# Altium PCB PCB_heater-base-2-ESP32-C3_2025-09-19.pcbdoc
Units mil, origin at the board's own origin, x right, y up, seen from the top; angles counter-clockwise.
Board outline 3875 x 3760 mil, 2 copper layers (Top Layer, Bottom Layer); 37 components, 59 nets, 195 pads, 35 vias.
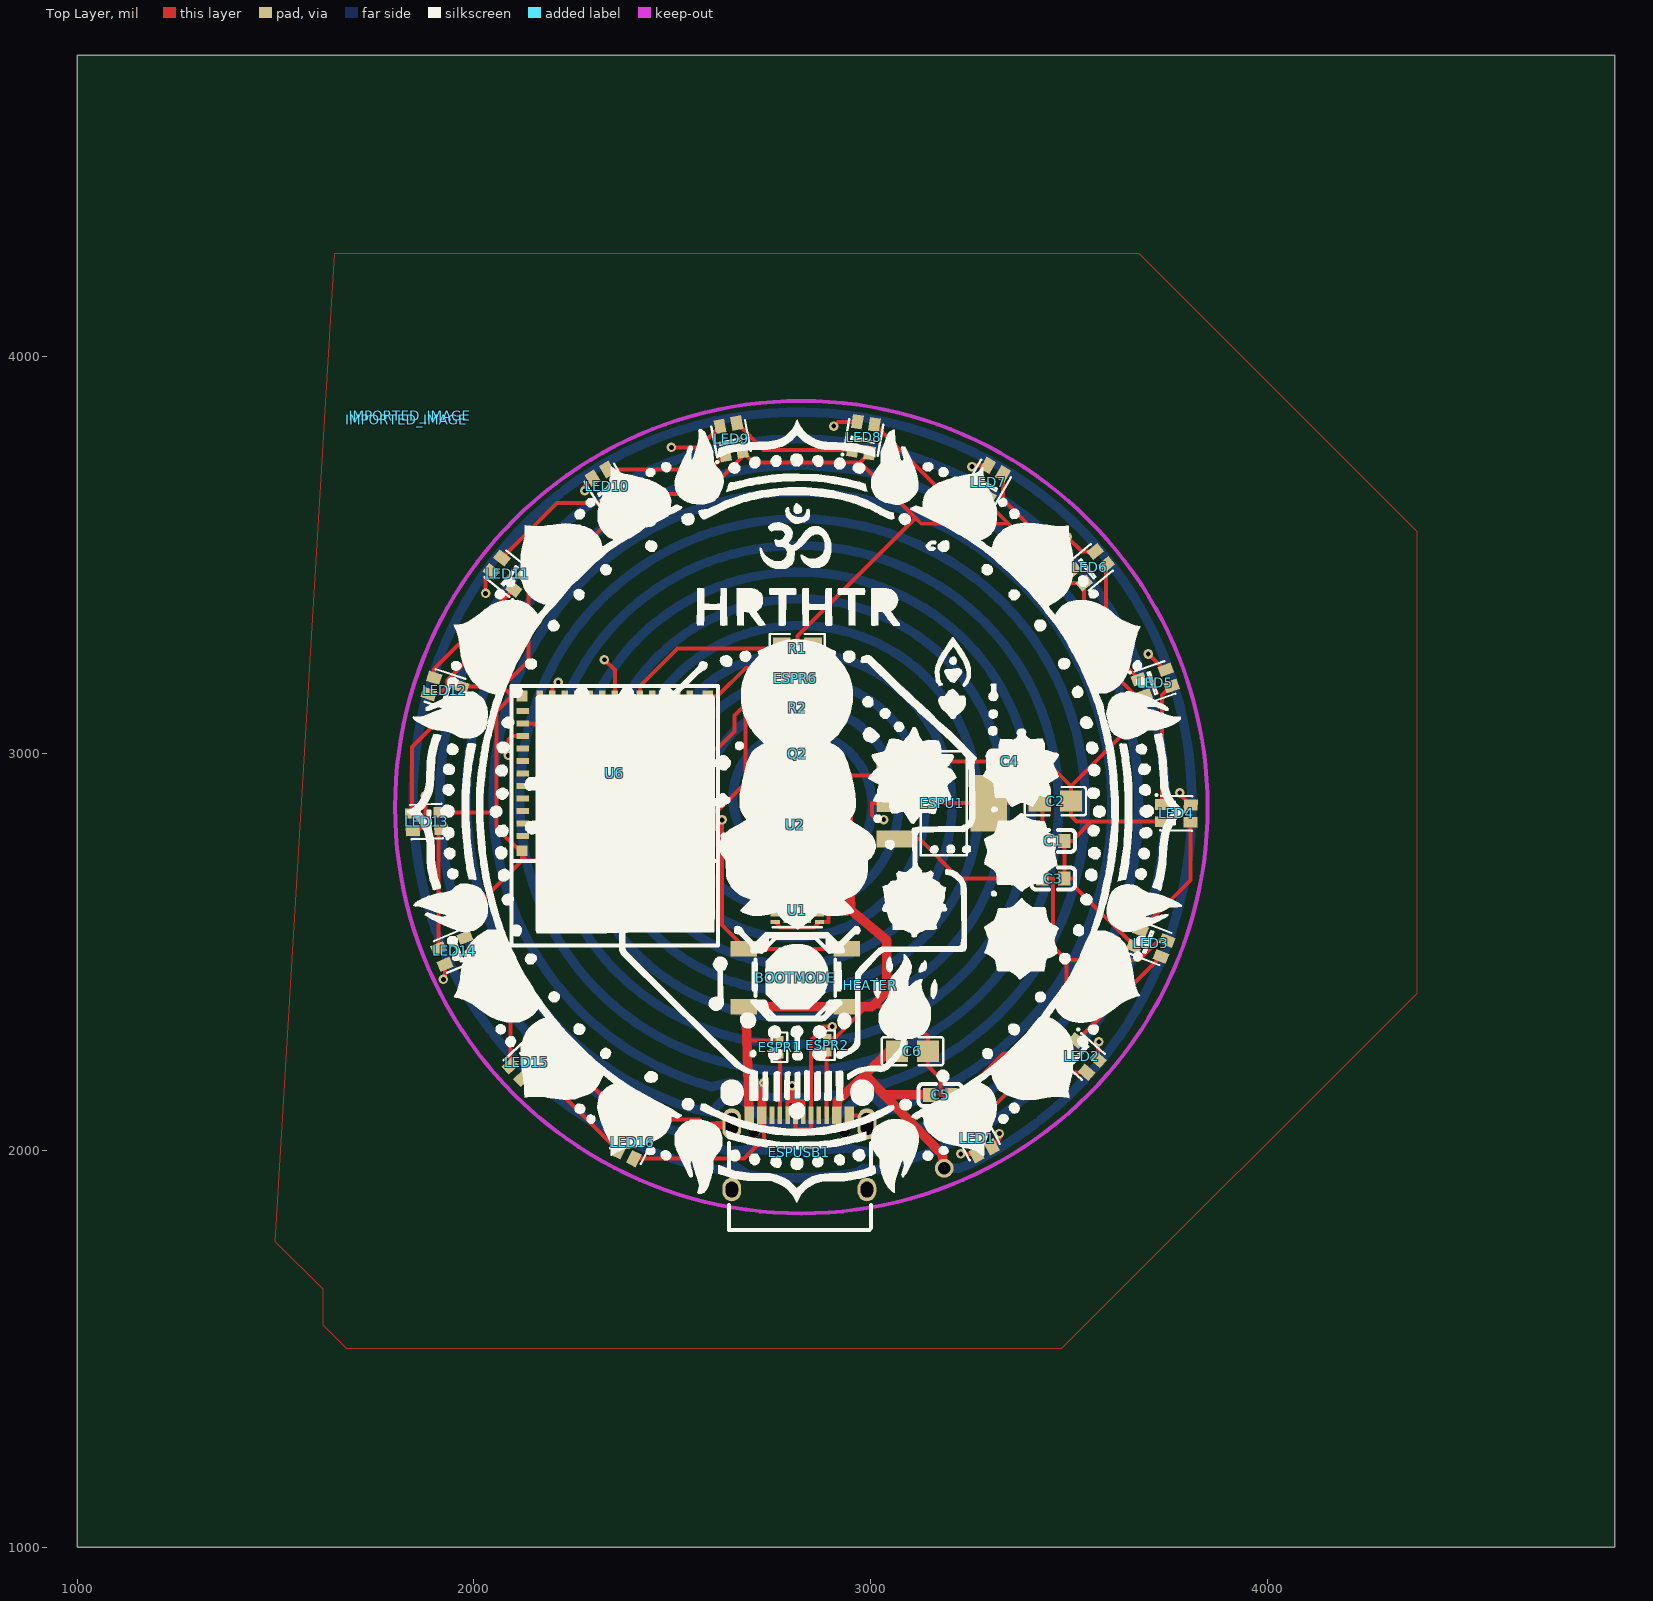
[diagram p0: Top Layer view]
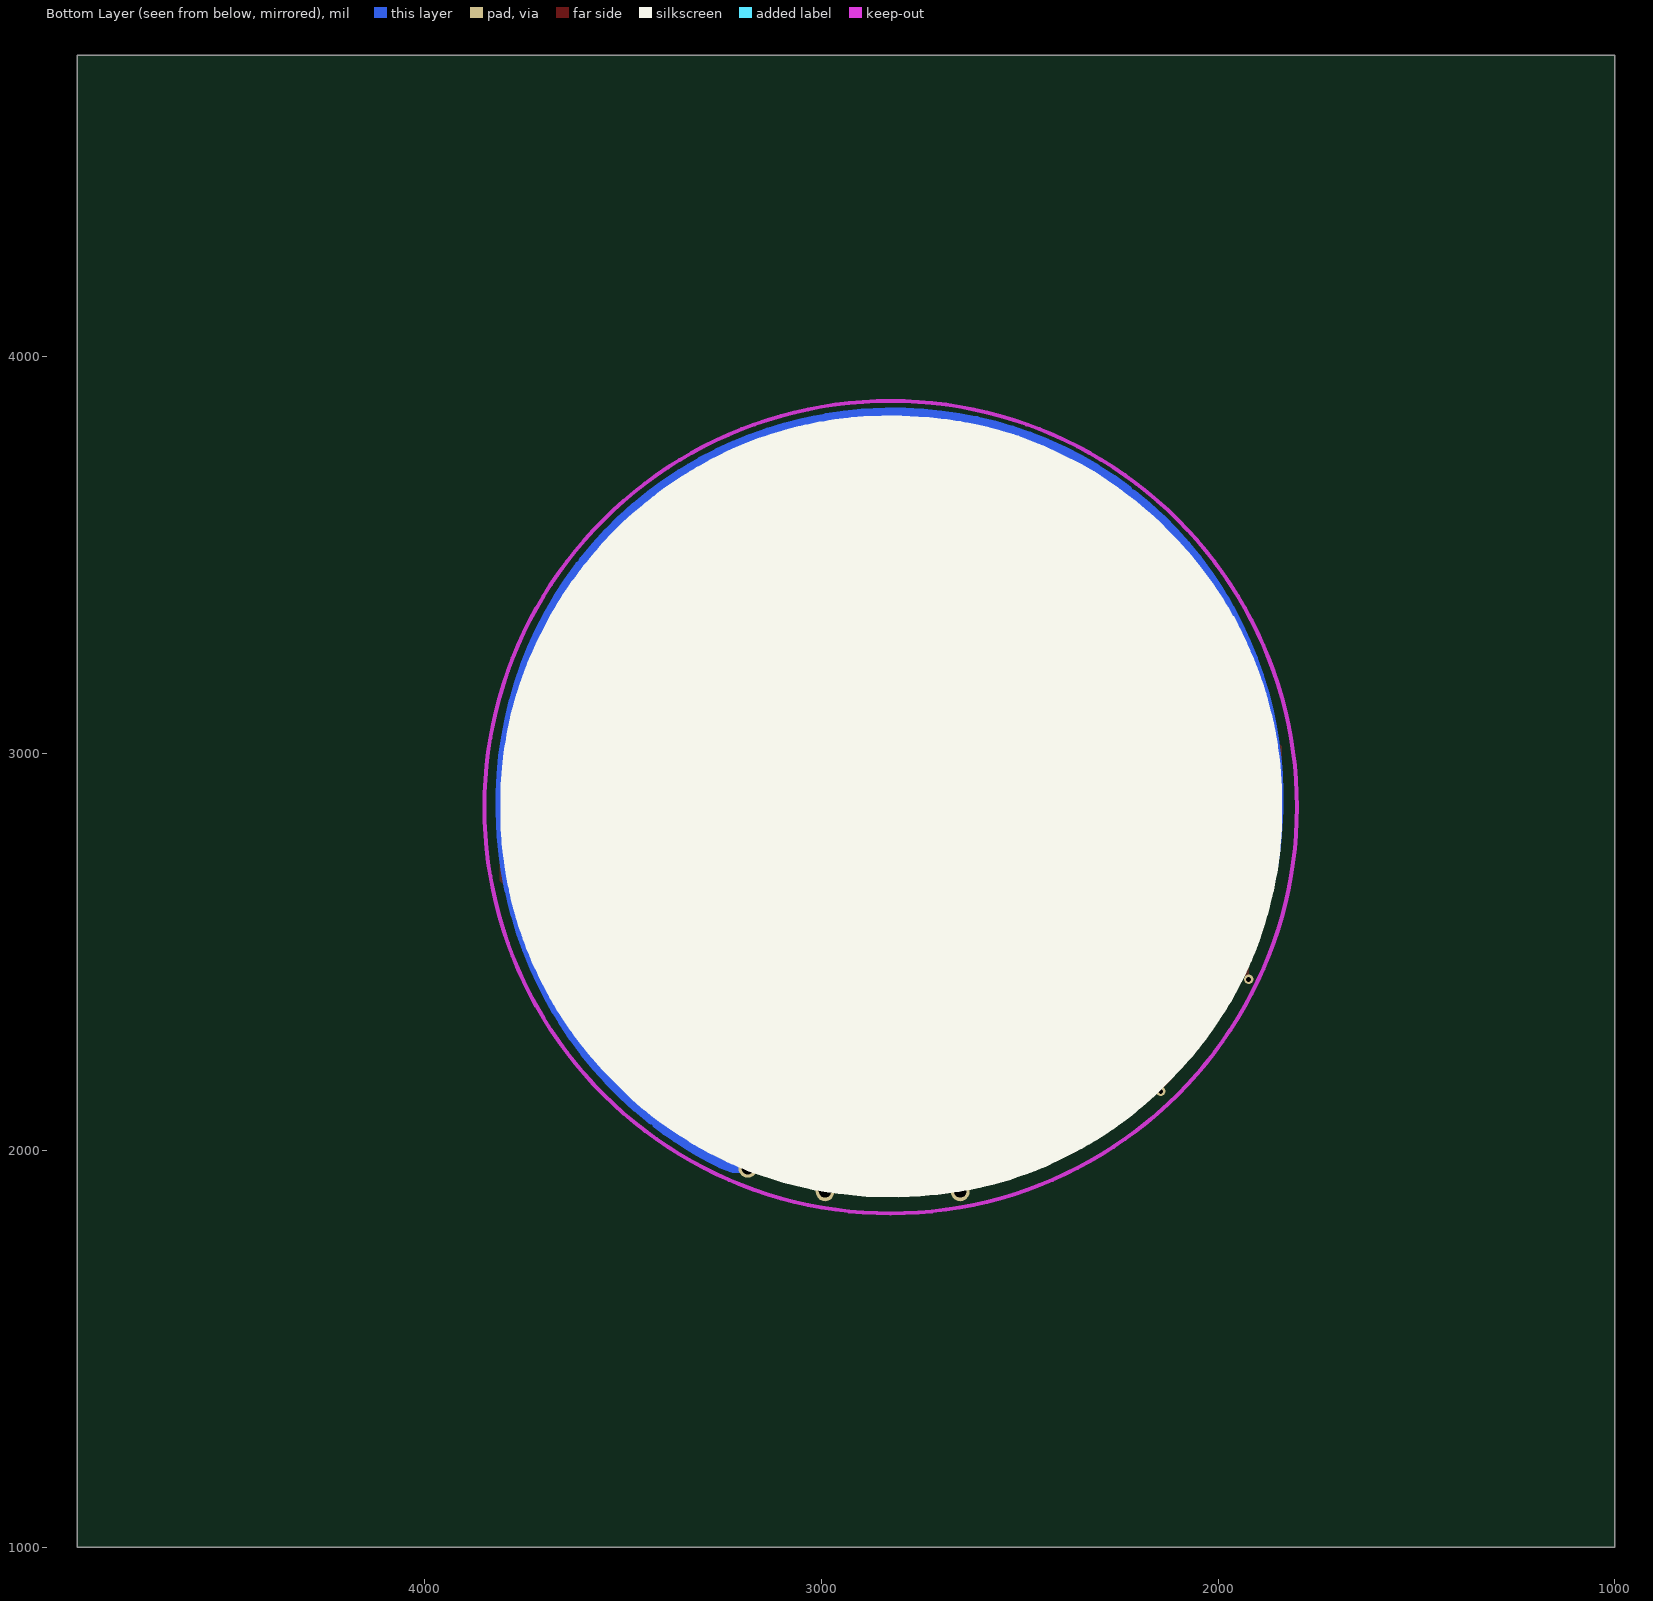
[diagram p1: Bottom Layer view, seen from below]

## Layer stack, top to bottom
Top Layer: signal copper (thickness not stored)
Dielectric: dielectric 12.6, FR-4, Dk 4.8
Bottom Layer: signal copper (thickness not stored)

## Board outline
4875,1000 1000,1000 1000,4760 4875,4760

## Components (designator, comment, footprint, x,y, rotation, side; value= is the part's Value field where it differs from the comment)
BOOTMODE "TS-1187A-B-A-B" SW-SMD_4P-L5.1-W5.1-P3.70-LS6.5-TL-2 2810,2435 r0 top
C1 "100nF" C0603 3460,2780 r0 top
C2 "10uF" C0805 3465,2880 r180 top
C3 "100nF" C0603 3460,2685 r180 top
C4 "100nF" C0603 3350,2980 r0 top
C5 "100nF" C0603 3175,2140 r180 top
C6 "10uF" C0805 3105,2250 r0 top
ESPR1 "4.7kΩ" R0402 2770,2260 r90 top
ESPR2 "4.7kΩ" R0402 2890,2265 r90 top
ESPR6 "10K" R0402 2810,3190 r0 top
ESPU1 "AMS1117-3.3" SOT-223-3_L6.5-W3.4-P2.30-LS7.0-BR 3180,2875 r180 top
ESPUSB1 "TYPE-C 16PIN 2MD(073)" USB-C-SMD_TYPE-C-6PIN-2MD-073 2820,1995 r0 top
HEATER "12.5" HEATER_SPIRAL_5CM 2805,2875 r0 top
IMPORTED_IMAGE "IMPORTED_IMAGE" IMPORTED_IMAGE 1839.25,3851.04 r0 top
IMPORTED_IMAGE "IMPORTED_IMAGE" IMPORTED_IMAGE 1830.75,3841.22 r0 top
LED1 "SK6805-EC20" LED-SMD_4P-L2.0-W2.0-TL_WS2812B-2020 3268.62,2030.74 r298 top
LED2 "SK6805-EC20" LED-SMD_4P-L2.0-W2.0-TL_WS2812B-2020 3531.03,2237.05 r318.35 top
LED3 "SK6805-EC20" LED-SMD_4P-L2.0-W2.0-TL_WS2812B-2020 3705.32,2521.74 r338.7 top
LED4 "SK6805-EC20" LED-SMD_4P-L2.0-W2.0-TL_WS2812B-2020 3769.72,2849.34 r359.05 top
LED5 "SK6805-EC20" LED-SMD_4P-L2.0-W2.0-TL_WS2812B-2020 3716.22,3178.84 r19.4 top
LED6 "SK6805-EC20" LED-SMD_4P-L2.0-W2.0-TL_WS2812B-2020 3551.43,3469.14 r39.75 top
LED7 "SK6805-EC20" LED-SMD_4P-L2.0-W2.0-TL_WS2812B-2020 3296.03,3684.14 r60.1 top
LED8 "SK6805-EC20" LED-SMD_4P-L2.0-W2.0-TL_WS2812B-2020 2981.72,3796.74 r80.45 top
LED9 "SK6805-EC20" LED-SMD_4P-L2.0-W2.0-TL_WS2812B-2020 2647.93,3793.14 r100.8 top
LED10 "SK6805-EC20" LED-SMD_4P-L2.0-W2.0-TL_WS2812B-2020 2336.22,3673.64 r121.15 top
LED11 "SK6805-EC20" LED-SMD_4P-L2.0-W2.0-TL_WS2812B-2020 2085.53,3453.24 r141.5 top
LED12 "SK6805-EC20" LED-SMD_4P-L2.0-W2.0-TL_WS2812B-2020 1927.12,3159.34 r161.85 top
LED13 "SK6805-EC20" LED-SMD_4P-L2.0-W2.0-TL_WS2812B-2020 1880.83,2828.74 r182.2 top
LED14 "SK6805-EC20" LED-SMD_4P-L2.0-W2.0-TL_WS2812B-2020 1952.33,2502.64 r202.55 top
LED15 "SK6805-EC20" LED-SMD_4P-L2.0-W2.0-TL_WS2812B-2020 2132.82,2221.84 r222.9 top
LED16 "SK6805-EC20" LED-SMD_4P-L2.0-W2.0-TL_WS2812B-2020 2399.72,2021.24 r243.25 top
Q2 "AO3400A" SOT-23-3_L2.9-W1.3-P1.90-LS2.4-BR 2815,3000 r270 top
R1 "240Ω" R0805 2815,3265 r180 top
R2 "10kΩ" R0805 2815,3115 r0 top
U1 "MCP9808T-E/MC" DFN-8_L3.0-W2.0-P0.50-TL-EP-1 2815,2605 r0 top
U2 "MCP9808T-E/MC" DFN-8_L3.0-W2.0-P0.50-TL-EP-1 2810,2820 r0 top
U6 "ESP32-C3-MINI-1-H4" WIFIM-SMD_ESP32-C3-MINI-1 2355,2950 r180 top

## Footprints (in the part's own frame and the unit in brackets; to place one, negate y for a bottom-side part, rotate by r counter-clockwise, add the part's x,y. Pads: shape width x height; smd on the part's side, far side on the other; paste and mask are expansions set on the pad)
C0603 [mm]
  rect 0.8x0.9 smd paste+0 mask+0.051: 1(-0.7,0) 2(0.7,0)
  silkscreen extent -1.39,-0.71 1.39,0.71
C0805 [mm]
  rect 1.41x1.35 smd paste-100 mask+0.051: 1(-1,0) 2(1,0)
  silkscreen extent -1.96,-0.9 1.96,0.9
DFN-8_L3.0-W2.0-P0.50-TL-EP-1 [mm]
  rect 0.585x0.28 smd paste+0 mask+0.051: 1(-1.417,0.75) 2(-1.417,0.25) 3(-1.417,-0.25) 4(-1.417,-0.75) 5(1.417,-0.75) 6(1.417,-0.25) 7(1.417,0.25) 8(1.417,0.75)
  rect 1.75x1.63 smd paste+0 mask+0.051: 9(0,0)
  silkscreen extent -2.08,-1.08 1.58,1.08
HEATER_SPIRAL_5CM [mm]
  round 1.2 hole 0.8 paste+0 mask+0.051: 1(0.183,0.043) 2(9.652,-23.368)
  Bottom Layer drawing of 1592 lines, arcs and shapes, not listed
IMPORTED_IMAGE [mil]
LED-SMD_4P-L2.0-W2.0-TL_WS2812B-2020 [mm]
  rect 0.9x0.7 smd paste+0 mask+0.051: 1(-0.915,0.55) 2(-0.915,-0.55) 3(0.915,-0.55) 4(0.915,0.55)
  silkscreen extent -1.3,-1.1 1,1.15
R0402 [mm]
  rect 0.566x0.54 smd paste-100 mask+0.051: 1(-0.433,0) 2(0.433,0)
  silkscreen extent -0.94,-0.5 0.94,0.5
R0805 [mil]
  rect 44.59x54.21 smd paste-3937.01 mask+2: 1(-39.37,0) 2(39.37,0)
  silkscreen extent -69,-36 69,36
SOT-23-3_L2.9-W1.3-P1.90-LS2.4-BR [mm]
  rect 1.25x0.7 smd paste+0 mask+0.051: 1(1,-0.95) 2(1,0.95) 3(-1,0)
  silkscreen extent -0.73,-1.53 0.73,1.53
SOT-223-3_L6.5-W3.4-P2.30-LS7.0-BR [mm]
  rect 2.5x1.1 smd paste+0 mask+0.051: 1(2.97,-2.3) 2(2.97,0) 3(2.97,2.3)
  rect 2.34x3.6 smd paste+0 mask+0.051: 4(-2.97,0)
  silkscreen extent -1.57,-3.33 1.37,3.33
SW-SMD_4P-L5.1-W5.1-P3.70-LS6.5-TL-2 [mm]
  rect 1.7x1 smd paste+0 mask+0.051: 1(-3.3,1.85) 2(3.3,1.85) 3(-3.3,-1.85) 4(3.3,-1.85)
  silkscreen extent -2.55,-2.55 2.55,2.55
USB-C-SMD_TYPE-C-6PIN-2MD-073 [mm]
  rect 0.6x1.1 smd paste-100 mask+0.05: 1(-3.2,2.375) 2(-2.4,2.375) 11(2.4,2.375) 12(3.2,2.375)
  rect 0.3x1.1 smd paste-100 mask+0.05: 3(-1.75,2.375) 4(-1.25,2.375) 5(-0.75,2.375) 6(-0.25,2.375) 7(0.25,2.375) 8(0.75,2.375) 9(1.25,2.375) 10(1.75,2.375)
  oval 1.2x1.5 hole 0.8 slot 1 at 90 deg paste+0 mask+0.05: 13(-4.325,-2.375) 14(4.325,-2.375)
  oval 1.2x2 hole 0.8 slot 1.4 at 90 deg paste+0 mask+0.05: 13(-4.325,1.825) 14(4.325,1.825)
  round 0.7 hole 0.7 unplated paste+0: ""(-2.89,1.305) ""(2.89,1.305)
  silkscreen extent -4.5,-4.97 4.57,0.6
WIFIM-SMD_ESP32-C3-MINI-1 [mm]
  rect 0.8x0.4 smd paste+0 mask+0.05: 1(-5.9,4) 2(-5.9,3.2) 3(-5.9,2.4) 4(-5.9,1.6) 5(-5.9,0.8) 6(-5.9,0) 7(-5.9,-0.8) 8(-5.9,-1.6) 9(-5.9,-2.4) 10(-5.9,-3.2) 11(-5.9,-4) 25(5.9,-4) 26(5.9,-3.2) 27(5.9,-2.4) 28(5.9,-1.6) 29(5.9,-0.8) 30(5.9,0) 31(5.9,0.8) 32(5.9,1.6) 33(5.9,2.4) 34(5.9,3.2) 35(5.9,4)
  rect 0.4x0.8 smd paste+0 mask+0.05: 12(-4.8,-4.9) 13(-4,-4.9) 14(-3.2,-4.9) 15(-2.4,-4.9) 16(-1.6,-4.9) 17(-0.8,-4.9) 18(0,-4.9) 19(0.8,-4.9) 20(1.6,-4.9) 21(2.4,-4.9) 22(3.2,-4.9) 23(4,-4.9) 24(4.8,-4.9) 36(4.8,4.9) 37(4,4.9) 38(3.2,4.9) 39(2.4,4.9) 40(1.6,4.9) 41(0.8,4.9) 42(0,4.9) 43(-0.8,4.9) 44(-1.6,4.9) 45(-2.4,4.9) 46(-3.2,4.9) 47(-4,4.9) 48(-4.8,4.9)
  rect 1.45x1.45 smd paste+0 mask+0.05: 49(-1.975,0) 49(-1.975,-1.975) 49(0,1.975) 49(0,0) 49(0,-1.975) 49(1.975,1.975) 49(1.975,0) 49(1.975,-1.975)
  rect 0.7x0.7 smd paste+0 mask+0.05: 50(5.95,4.95) 51(5.95,-4.95) 52(-5.95,-4.95) 53(-5.95,4.95)
  Top Layer region: -2.7,2.1 -2.1,2.7 -1.25,2.7 -1.25,1.25 -2.7,1.25
  silkscreen extent -7.1,-5.6 6.6,11

## Via types
v1: diameter 24.02, hole 12.01, Top Layer to Bottom Layer, tented both sides, 35 vias

## Nets (pads, with @x,y where several pads share a name; then routed paths per layer and width w, separated by ;. In a path a pad name is that pad's centre, name@x,y a point inside that pad or via, vN(x,y) a via of type N, cw(c..) or ccw(c..) an arc to the next point about the centre after c; other vN are vias at no path point)
+3V3: C1.1 C2.2 C4.2 ESPR6.2 ESPU1.2 ESPU1.4 U1.7 U1.8 U2.8 U6.3 | length 2169.1
  Top Layer w10: U6.3 2614.02,2855.51 2673.02,2914.51 v1@2684.67,2914.51 ; v1(2686.12,2913.06) v1@2684.67,2914.51 ; ESPR6.2 2849.17,3190 2849.17,3169.28 2846.26,3166.37 2756.74,3166.37 2684.67,3094.3 v1@2684.67,2914.51 ; v1(2846.85,2707.69) 2870.81,2683.73 U1.8 2893.32,2634.53 ; U2.8 2896.55,2849.53 2916.22,2829.86 2916.22,2657.43 2893.32,2634.53 ; U1.7 2893.32,2614.84 2893.32,2634.53 ; v1(3032.7,2833.59) 3014.55,2833.59 3002.87,2845.27 3002.87,2875 ESPU1.2 ESPU1.4 3359.19,2875 3364.19,2880 ; C4.2 3364.19,2980 3364.19,2880 ; C2.2 C2.2@3406.26,2880 ; C1.1 3432.44,2853.82 C2.2@3406.26,2880 ; 3364.19,2880 3386.88,2880 C2.2@3406.26,2880
  Mid-Layer 1 w10: v1(2686.12,2913.06) 2782.73,2816.45 2846.85,2816.45 ; v1(2846.85,2707.69) 2846.85,2816.45 ; v1(3032.7,2833.59) 2863.99,2833.59 2846.85,2816.45
+5V: C3.2 ESPU1.3 ESPUSB1.2 ESPUSB1.11 LED1.4 LED2.4 LED3.4 LED4.4 LED5.4 LED6.4 LED7.4 LED8.4 LED9.4 LED10.4 LED11.4 LED12.4 LED13.4 LED14.4 LED15.4 LED16.4 | length 14832.3
  Top Layer w10: LED13.4 1859.47,2805.72 1877.48,2823.73 v1(1877.48,2893.83) ; LED12.4 1912.34,3149.99 1931.83,3169.48 1931.83,3183.93 2017.26,3269.36 v1(2108.62,3269.36) ; v1(1923.31,2430.82) 1927.36,2434.87 LED14.4 ; v1(2029.54,3403.52) 2029.54,3444.41 LED11.4@2043.85,3458.72 ; LED15.4 2144.35,2158.29 v1@2144.35,2148.82 ; v1(2279.07,3662.24) 2279.07,3673.28 LED10.4 ; LED16.4 2680.08,1979.33 2731.34,2030.59 2731.34,2082.68 ESPUSB1.2 2726,2124 v1(2730,2170) ; v1(2497.52,3771.27) 2566.7,3771.27 LED9.4 ; v1(2906.7,3825.1) 2917.46,3835.86 LED8.4 ; ESPU1.3@3063.07,2784.45 3123.28,2784.45 3222.73,2685 C3.2 3459.18,2685 3459.18,2514.3 3493.36,2480.12 ; v1(3254.97,3723.08) 3258.06,3726.17 LED7.4 ; LED1.4 3323.92,2028.36 v1(3323.92,2042.58) ; v1(3493.36,2395.96) 3493.36,2480.12 ; v1(3494.83,3546.06) 3532.06,3508.83 LED6.4 ; LED2.4 3572.34,2271.5 v1(3574.87,2274.03) ; v1(3699.09,3250.79) 3738.64,3211.24 LED5.4 ; LED3.4 3724.5,2528.83 3675.79,2480.12 3493.36,2480.12 ; v1(3778.22,2901.22) 3778.22,2898.28 LED4.4
  Top Layer w23.62: ESPUSB1.2 2726,2124 v1(2730,2170)
  Mid-Layer 2 w10: v1(1877.48,2893.83) 1842.19,2893.83 1841.21,2894.81 ; v1(1923.31,2430.82) 1932.09,2439.6 1932.09,2450.95 ; v1(2108.62,3269.36) 2108.62,3324.44 v1(2029.54,3403.52) 2023.71,3403.52 2010.17,3417.06 ; v1@2144.35,2148.82 v1@2149.85,2148.82 ; v1(2279.07,3662.24) 2267.87,3673.44 2267.87,3676.39 ; 2488,1940.11 2488.05,1940.23 ; 2488.37,1940.11 2488.31,1940.13 2488.05,1940.23 ; v1(2497.52,3771.27) 2497.52,3782.8 2513.32,3798.6 ; v1(2730,2170) 2695,2170 2575,2140 2488.05,1940.23 ; v1(2906.7,3825.1) 2906.7,3845.45 2907.07,3845.82 ; v1(3254.97,3723.08) 3271.76,3739.87 3271.76,3742.01 ; 3287.08,1995.96 3294.89,2000.16 3302.67,2004.43 3310.41,2008.77 3318.11,2013.18 3325.77,2017.66 3333.39,2022.21 ; v1(3323.92,2042.58) 3333.39,2033.11 3333.39,2022.21 ; v1(3493.36,2395.96) 3574.87,2314.45 v1(3574.87,2274.03) 3592.55,2256.35 3592.55,2248.86 ; v1(3494.83,3546.06) 3502.82,3554.05 3502.82,3578.66 ; v1(3699.09,3250.79) 3699.09,3262 3717.35,3280.26 ; v1(3778.22,2901.22) 3798.79,2901.22 3801.31,2898.7 3808.67,2898.7 ; 1841.21,2894.81 1841.24,2895.98 1841.56,2904.85 1841.96,2913.71 1842.44,2922.58 1843,2931.43 1843.63,2940.28 1844.35,2949.13 1845.15,2957.96 1846.03,2966.79 1846.99,2975.61 1848.02,2984.43 1849.14,2993.23 1850.34,3002.02 1851.61,3010.8 1852.96,3019.57 1854.4,3028.33 1855.91,3037.07 1857.5,3045.8 1859.17,3054.52 1860.92,3063.22 1862.74,3071.9 1864.65,3080.57 1866.63,3089.22 1868.69,3097.85 1870.83,3106.46 1873.04,3115.05 1875.34,3123.63 1877.71,3132.18 1880.16,3140.71 1882.68,3149.21 1885.28,3157.7 1887.96,3166.16 1890.71,3174.59 1893.54,3183 1896.44,3191.39 1899.42,3199.75 1902.48,3208.08 1905.61,3216.38 1908.82,3224.65 1912.1,3232.9 1915.45,3241.11 1918.88,3249.3 1922.38,3257.45 1925.95,3265.57 1929.6,3273.66 1933.32,3281.72 1937.11,3289.74 1940.98,3297.73 1944.92,3305.68 1948.93,3313.6 1953.01,3321.48 1957.16,3329.32 1961.38,3337.12 1965.67,3344.89 1970.03,3352.62 1974.46,3360.31 1978.96,3367.96 1983.53,3375.56 1988.17,3383.13 1992.87,3390.65 1997.65,3398.13 2002.49,3405.57 2007.39,3412.96 2010.17,3417.06 ; 1841.21,2894.81 1841,2887.11 1840.84,2878.24 1840.76,2869.37 1840.76,2860.49 1840.84,2851.62 1841,2842.75 1841.24,2833.88 1841.56,2825.01 1841.96,2816.15 1842.44,2807.29 1843.01,2798.43 1843.65,2789.58 1844.37,2780.73 1845.16,2771.9 1846.04,2763.07 1847,2754.25 1848.04,2745.43 1849.16,2736.63 1850.36,2727.84 1851.63,2719.06 1852.99,2710.29 1854.42,2701.53 1855.93,2692.79 1857.53,2684.06 1859.2,2675.34 1860.95,2666.64 1862.77,2657.96 1864.68,2649.29 1866.66,2640.65 1868.72,2632.01 1870.86,2623.4 1873.08,2614.81 1875.37,2606.24 1877.75,2597.69 1880.19,2589.16 1882.72,2580.65 1885.32,2572.17 1888,2563.71 1890.75,2555.27 1893.58,2546.86 1896.49,2538.48 1899.47,2530.12 1902.53,2521.79 1905.66,2513.49 1908.87,2505.22 1912.15,2496.97 1915.5,2488.76 1918.93,2480.57 1922.43,2472.42 1926.01,2464.3 1929.66,2456.21 1932.09,2450.95 ; 1932.09,2450.95 1933.38,2448.15 1937.17,2440.13 1941.04,2432.15 1944.98,2424.19 1948.99,2416.28 1953.07,2408.4 1957.22,2400.56 1961.44,2392.75 1965.74,2384.99 1970.1,2377.26 1974.53,2369.57 1979.03,2361.92 1983.6,2354.32 1988.24,2346.75 1992.95,2339.23 1997.72,2331.75 2002.56,2324.31 2007.47,2316.92 2012.44,2309.57 2017.48,2302.27 2022.59,2295.01 2027.76,2287.8 2033,2280.64 2038.3,2273.52 2043.66,2266.45 2049.09,2259.43 2054.58,2252.46 2060.13,2245.54 2065.75,2238.67 2071.43,2231.85 2077.17,2225.08 2082.97,2218.37 2088.83,2211.71 2094.75,2205.09 2100.72,2198.54 2106.76,2192.04 2112.86,2185.59 2119.01,2179.2 2125.22,2172.86 2131.49,2166.58 2137.82,2160.35 2144.2,2154.19 v1@2149.85,2148.82 ; 2010.17,3417.06 2012.37,3420.31 2017.4,3427.61 2022.51,3434.87 2027.68,3442.08 2032.91,3449.25 2038.21,3456.37 2043.58,3463.44 2049,3470.46 2054.49,3477.43 2060.05,3484.35 2065.66,3491.22 2071.34,3498.04 2077.08,3504.81 2082.87,3511.53 2088.73,3518.19 2094.65,3524.8 2100.63,3531.36 2106.67,3537.86 2112.76,3544.31 2118.92,3550.7 2125.13,3557.04 2131.39,3563.32 2137.72,3569.55 2144.1,3575.72 2150.53,3581.83 2157.02,3587.88 2163.57,3593.87 2170.16,3599.8 2176.82,3605.68 2183.52,3611.49 2190.28,3617.24 2197.08,3622.94 2203.94,3628.57 2210.85,3634.13 2217.81,3639.64 2224.82,3645.08 2231.88,3650.46 2238.98,3655.78 2246.13,3661.03 2253.33,3666.21 2260.58,3671.33 2267.87,3676.39 ; v1@2149.85,2148.82 2150.63,2148.08 2157.12,2142.03 2163.67,2136.04 2170.27,2130.1 2176.92,2124.23 2183.63,2118.42 2190.38,2112.67 2197.19,2106.98 2204.05,2101.35 2210.96,2095.78 2217.92,2090.27 2224.93,2084.83 2231.99,2079.45 2239.09,2074.14 2246.25,2068.89 2253.45,2063.7 2260.69,2058.58 2267.99,2053.53 2275.33,2048.54 2282.71,2043.62 2290.14,2038.76 2297.61,2033.97 2305.12,2029.25 2312.68,2024.6 2320.27,2020.02 2327.91,2015.5 2335.59,2011.05 2343.31,2006.68 2351.07,2002.37 2358.86,1998.13 2366.7,1993.96 2374.57,1989.87 2382.48,1985.84 2390.42,1981.89 2398.4,1978.01 2406.41,1974.2 2414.46,1970.46 2422.54,1966.79 2430.66,1963.2 2438.8,1959.68 2446.98,1956.24 2455.19,1952.87 2463.43,1949.57 2471.69,1946.35 2479.99,1943.2 2488.05,1940.23 ; 2267.87,3676.39 2275.21,3681.38 2282.59,3686.3 2290.02,3691.16 2297.49,3695.95 2305,3700.67 2312.56,3705.33 2320.15,3709.91 2327.79,3714.43 2335.47,3718.88 2343.19,3723.26 2350.94,3727.56 2358.74,3731.8 2366.57,3735.97 2374.44,3740.07 2382.35,3744.1 2390.29,3748.05 2398.27,3751.93 2406.29,3755.74 2414.33,3759.48 2422.41,3763.15 2430.53,3766.74 2438.67,3770.26 2446.85,3773.71 2455.06,3777.08 2463.3,3780.38 2471.56,3783.6 2479.86,3786.75 2488.18,3789.83 2496.54,3792.82 2504.91,3795.75 2513.32,3798.6 ; 2513.32,3798.6 2521.75,3801.37 2530.2,3804.06 2538.68,3806.68 2547.18,3809.23 2555.7,3811.69 2564.25,3814.08 2572.82,3816.39 2581.4,3818.63 2590.01,3820.79 2598.64,3822.87 2607.28,3824.87 2615.94,3826.79 2624.62,3828.64 2633.32,3830.4 2642.03,3832.09 2650.76,3833.7 2659.5,3835.24 2668.25,3836.69 2677.02,3838.06 2685.8,3839.36 2694.59,3840.57 2703.39,3841.71 2712.2,3842.76 2721.02,3843.74 2729.84,3844.64 2738.68,3845.46 2747.52,3846.2 2756.37,3846.85 2765.23,3847.43 2774.09,3847.93 2782.95,3848.35 2791.82,3848.69 2800.69,3848.95 2809.56,3849.13 2818.43,3849.23 2827.3,3849.25 2836.18,3849.19 2845.05,3849.05 2853.92,3848.82 2862.79,3848.52 2871.65,3848.14 2880.52,3847.68 2889.37,3847.14 2898.22,3846.52 2907.07,3845.82 ; 2907.07,3845.82 2915.91,3845.04 2924.74,3844.18 2933.57,3843.24 2942.38,3842.23 2951.19,3841.13 2959.98,3839.95 2968.76,3838.69 2977.54,3837.36 2986.3,3835.94 2995.04,3834.45 3003.78,3832.88 3012.5,3831.23 3021.2,3829.5 3029.89,3827.69 3038.56,3825.8 3047.21,3823.84 3055.85,3821.8 3064.46,3819.68 3073.06,3817.48 3081.64,3815.2 3090.19,3812.85 3098.73,3810.42 3107.24,3807.92 3115.73,3805.33 3124.19,3802.67 3132.63,3799.94 3141.05,3797.13 3149.44,3794.24 3157.81,3791.28 3166.14,3788.24 3174.45,3785.13 3182.73,3781.94 3190.99,3778.68 3199.21,3775.34 3207.4,3771.93 3215.56,3768.44 3223.69,3764.89 3231.79,3761.26 3239.85,3757.55 3247.88,3753.78 3255.88,3749.93 3263.84,3746.01 3271.76,3742.01 ; 3271.76,3742.01 3279.65,3737.95 3287.5,3733.82 3295.31,3729.61 3303.09,3725.34 3310.83,3720.99 3318.52,3716.58 3326.18,3712.09 3333.8,3707.54 3341.37,3702.92 3348.91,3698.23 3356.4,3693.47 3363.84,3688.65 3371.25,3683.76 3378.61,3678.8 3385.92,3673.77 3393.19,3668.68 3400.41,3663.53 3407.59,3658.31 3414.72,3653.03 3421.8,3647.68 3428.83,3642.26 3435.81,3636.79 3442.74,3631.25 3449.63,3625.65 3456.46,3619.99 3463.24,3614.27 3469.97,3608.48 3476.65,3602.64 3483.27,3596.73 3489.84,3590.77 3496.36,3584.74 3502.82,3578.66 ; 3333.39,2022.21 3340.97,2026.83 3348.5,2031.52 3355.99,2036.27 3363.44,2041.09 3370.85,2045.98 3378.21,2050.93 3385.53,2055.95 3392.8,2061.04 3400.02,2066.19 3407.2,2071.41 3414.33,2076.69 3421.42,2082.03 3428.45,2087.44 3435.44,2092.91 3442.37,2098.45 3449.26,2104.05 3456.09,2109.7 3462.88,2115.42 3469.61,2121.21 3476.29,2127.05 3482.91,2132.95 3489.49,2138.91 3496.01,2144.93 3502.47,2151.01 3508.88,2157.15 3515.23,2163.34 3521.53,2169.59 3527.77,2175.9 3533.96,2182.26 3540.08,2188.68 3546.15,2195.16 3552.16,2201.68 3558.11,2208.27 3564,2214.9 3569.83,2221.59 3575.6,2228.33 3581.31,2235.13 3586.96,2241.97 3592.55,2248.86 ; 3502.82,3578.66 3509.22,3572.52 3515.57,3566.32 3521.87,3560.07 3528.11,3553.76 3534.29,3547.39 3540.41,3540.97 3546.48,3534.49 3552.48,3527.96 3558.43,3521.38 3564.32,3514.74 3570.15,3508.05 3575.91,3501.3 3581.62,3494.51 3587.26,3487.66 3592.85,3480.76 3598.37,3473.81 3603.82,3466.82 3609.22,3459.77 3614.55,3452.68 3619.81,3445.54 3625.01,3438.35 3630.15,3431.11 3635.22,3423.83 3640.23,3416.5 3645.17,3409.13 3650.04,3401.71 3654.84,3394.25 3659.58,3386.75 3664.25,3379.21 3668.85,3371.62 3673.39,3363.99 3677.85,3356.32 3682.24,3348.61 3686.57,3340.86 3690.82,3333.08 3695.01,3325.25 3699.12,3317.39 3703.17,3309.49 3707.14,3301.56 3711.04,3293.59 3714.87,3285.58 3717.35,3280.26 ; 3592.55,2248.86 3598.07,2255.81 3603.53,2262.8 3608.93,2269.85 3614.26,2276.94 3619.53,2284.08 3624.74,2291.26 3629.88,2298.5 3634.95,2305.78 3639.96,2313.1 3644.9,2320.47 3649.78,2327.89 3654.59,2335.34 3659.33,2342.84 3664,2350.39 3668.61,2357.97 3673.14,2365.6 3677.61,2373.26 3682.01,2380.97 3686.34,2388.72 3690.6,2396.5 3694.79,2404.32 3698.9,2412.18 3702.95,2420.08 3706.93,2428.01 3710.83,2435.98 3714.66,2443.99 3718.42,2452.02 3722.11,2460.1 3725.72,2468.2 3729.26,2476.34 3732.73,2484.5 3736.12,2492.7 3739.44,2500.93 3742.69,2509.19 3745.86,2517.48 3748.95,2525.79 3751.97,2534.14 3754.92,2542.51 3757.79,2550.91 3760.58,2559.33 3763.3,2567.77 3765.94,2576.25 3768.51,2584.74 3771,2593.26 3773.41,2601.8 3775.74,2610.36 3778,2618.94 3780.18,2627.54 3782.28,2636.16 3784.3,2644.8 3786.25,2653.46 3788.12,2662.13 3789.91,2670.83 3791.62,2679.53 3793.25,2688.25 3794.81,2696.99 3796.28,2705.74 3797.68,2714.5 3798.99,2723.28 3800.23,2732.07 3801.39,2740.86 3802.47,2749.67 3803.47,2758.49 3804.39,2767.31 3805.23,2776.15 3805.99,2784.99 3806.68,2793.83 3807.28,2802.69 3807.8,2811.55 3808.24,2820.41 3808.6,2829.27 3808.88,2838.14 3809.09,2847.01 3809.21,2855.89 3809.25,2864.76 3809.21,2873.63 3809.1,2882.51 3808.9,2891.38 3808.67,2898.7 ; 3717.35,3280.26 3718.62,3277.54 3722.3,3269.47 3725.91,3261.36 3729.45,3253.22 3732.91,3245.05 3736.3,3236.85 3739.62,3228.62 3742.86,3220.36 3746.03,3212.07 3749.12,3203.76 3752.13,3195.41 3755.08,3187.04 3757.94,3178.64 3760.73,3170.22 3763.44,3161.77 3766.08,3153.3 3768.64,3144.8 3771.13,3136.28 3773.53,3127.74 3775.86,3119.18 3778.12,3110.6 3780.29,3101.99 3782.39,3093.37 3784.41,3084.73 3786.35,3076.07 3788.22,3067.4 3790,3058.71 3791.71,3050 3793.34,3041.27 3794.89,3032.54 3796.36,3023.79 3797.75,3015.02 3799.06,3006.25 3800.3,2997.46 3801.45,2988.66 3802.53,2979.85 3803.52,2971.04 3804.44,2962.21 3805.28,2953.38 3806.03,2944.54 3806.71,2935.69 3807.31,2926.83 3807.82,2917.98 3808.26,2909.11 3808.62,2900.25 3808.67,2898.7
  Mid-Layer 2 w23.62: 2488,1940.11 2575,2140 2695,2170 v1(2730,2170) ; 2488.37,1940.11 cw(c2825,2865) 3287.08,1995.96
  other v1: 2144.35,2148.82
BOOTMODE: BOOTMODE.1 BOOTMODE.2 U6.23 | length 1213
  Top Layer w10: U6.23 2197.52,3169.65 2202.68,3169.65 v1(2212.5,3179.47) ; v1(2625.04,2832.74) 2625.04,2568.31 BOOTMODE.1@2685.51,2507.84 ; BOOTMODE.1 BOOTMODE.1@2685.51,2507.84 ; BOOTMODE.2 2724.53,2507.84 BOOTMODE.1@2685.51,2507.84
  Mid-Layer 1 w10: v1(2212.5,3179.47) 2280.5,3179.47 2625.04,2834.93 v1(2625.04,2832.74)
ESPR1_1: ESPR1.1 ESPUSB1.4 | length 154.8
  Top Layer w10: ESPR1.1 2770,2220.84 2770.8,2220.04 ESPUSB1.4
ESPR2_1: ESPR2.1 ESPUSB1.10 | length 159.9
  Top Layer w10: ESPUSB1.10 2888.91,2224.75 2890,2225.84 ESPR2.1
GND: BOOTMODE.3 BOOTMODE.4 C1.2 C2.1 C3.1 C4.1 C5.1 C6.2 ESPR1.2 ESPR2.2 ESPU1.1 ESPUSB1.1 ESPUSB1.12 ESPUSB1.13 ESPUSB1.14 LED1.2 LED2.2 LED3.2 LED4.2 LED5.2 LED6.2 LED7.2 LED8.2 LED9.2 LED10.2 LED11.2 LED12.2 LED13.2 LED14.2 LED15.2 LED16.2 Q2.2 R2.2 U1.4 U1.5 U1.6 U2.4 U2.5 U2.6 U2.7 U6.1 U6.2 U6.36 U6.37 U6.38 U6.39 U6.40 U6.41 U6.42 U6.43 U6.44 U6.45 U6.46 U6.47 U6.48 U6.49 U6.50 U6.51 U6.52 U6.53 | length 23495
  Top Layer w10: LED13.2 2056.94,2851.77 ; LED12.2 2072.16,3168.7 ; LED14.2 1977.29,2586.89 2120.75,2730.35 U6.50@2120.75,2742.74 ; U6.50 U6.50@2120.75,2748.93 ; U6.51 2095.98,3144.88 ; LED15.2 2149.55,2267.31 2192.45,2267.31 LED16.2 2411.68,2078.24 2566.76,2078.24 v1(2585,2060) ESPUSB1.13@2649.73,2066.85 ; U6.37 U6.37@2197.52,2769.35 ; U6.38 U6.38@2229.02,2769.35 ; U6.39 U6.39@2260.51,2769.35 ; U6.49@2277.25,2872.25 2355,2872.25 2393.88,2872.25 ; U6.49@2277.25,2950 2355,2950 2393.88,2950 ; U6.49@2277.25,3027.76 2355,3027.76 2393.88,3027.76 ; U6.40 U6.40@2292.01,2769.35 ; U6.41 U6.41@2323.5,2769.35 ; U6.42 U6.42@2355,2769.35 ; U6.43 U6.43@2386.5,2769.35 ; U6.44 U6.44@2417.99,2769.35 ; U6.49@2432.76,2950 2393.88,2950 ; U6.49@2432.76,3027.76 2393.88,3027.76 ; U6.45 U6.45@2449.49,2769.35 ; U6.46 U6.46@2480.98,2769.35 ; U6.47 U6.47@2512.48,2769.35 ; U6.48 2543.98,2783.83 ; U6.2 2560.55,2824.02 2560.55,2792.52 ; U6.53@2589.25,2755.12 2589.25,2779.89 2587.28,2781.86 U6.1 2560.55,2792.52 ; U6.52@2589.25,3144.88 2614.02,3144.88 2685.32,3216.18 2815,3216.18 ; LED9.2 LED9.2@2683.08,3754.7 ; BOOTMODE.3 BOOTMODE.3@2685.08,2362.16 ; ESPUSB1.1 2687.93,2275.07 ; U2.4 2767.81,2776.85 2852.19,2776.85 ; U1.4 2772.81,2561.85 2857.19,2561.85 U1.5 2893.32,2575.47 2893.32,2595.16 ; ESPR1.2 2689.9,2277.04 2687.93,2275.07 ; Q2.2 2852.4,2955.63 2898.12,2955.63 2940,2945 ; R2.2 2868.47,3129.1 2868.47,3195.13 2847.42,3216.18 2815,3216.18 ; U2.6 2885.41,2810.16 ; U2.7 2888.32,2829.84 2888.32,2813.07 2885.41,2810.16 ; U1.6 2893.32,2595.16 ; ESPR2.2 2911.62,2282.04 2911.62,2284.39 2989.39,2362.16 ; v1(2893.16,2733.03) 2852.19,2774 2852.19,2776.85 ; ESPUSB1.12 2968.62,2088.51 ESPUSB1.14@2990.28,2066.85 ; v1(2963.64,2704.67) 2947.72,2704.67 2947.09,2704.04 ; LED8.2 2972.79,3733.32 ; ESPU1.1 ESPU1.1@3074.04,2965.55 ; LED1.2 3218.9,2066.08 3218.9,2140 ; LED7.2 3296.84,3628.83 3346.67,3579 ; C3.1 C3.1@3500.93,2685 ; LED2.2 3334.1,2244.8 3229.3,2140 3218.9,2140 ; LED3.2 3514.3,2664.25 3514.3,2685 C3.1@3500.93,2685 ; LED5.2 3688.32,3145.33 3668.35,3145.33 ; LED4.2 3555.25,2828.29 ; 2056.94,2851.77 2056.94,3105.84 2095.98,3144.88 ; 2056.94,2851.77 2056.94,2812.74 U6.50@2120.75,2748.93 ; 2072.16,3168.7 2095.98,3144.88 ; 2072.16,3168.7 2137.14,3233.68 2137.14,3437.83 LED11.2 2202.77,3447.77 2373.39,3618.39 LED10.2 2582.4,3654.02 LED9.2@2683.08,3754.7 ; U6.50@2120.75,2742.74 U6.50@2120.75,2748.93 ; U6.50@2120.75,2742.74 2133.14,2730.35 2166.02,2730.35 U6.36 2166.02,2783.83 2183.04,2783.83 U6.37@2197.52,2769.35 ; U6.37@2197.52,2769.35 2197.52,2783.83 2214.54,2783.83 U6.38@2229.02,2769.35 ; U6.38@2229.02,2769.35 2229.02,2783.83 2246.03,2783.83 U6.39@2260.51,2769.35 ; U6.39@2260.51,2769.35 2260.51,2783.83 2277.53,2783.83 U6.40@2292.01,2769.35 ; U6.40@2292.01,2769.35 2292.01,2783.83 2309.02,2783.83 U6.41@2323.5,2769.35 ; U6.41@2323.5,2769.35 2323.5,2783.83 2340.52,2783.83 U6.42@2355,2769.35 ; U6.42@2355,2769.35 2355,2783.83 2372.02,2783.83 U6.43@2386.5,2769.35 ; U6.43@2386.5,2769.35 2386.5,2783.83 2403.51,2783.83 U6.44@2417.99,2769.35 ; 2393.88,2872.25 2432.75,2872.25 2432.76,2783.83 ; 2393.88,2872.25 2393.88,2950 ; 2393.88,2950 2393.88,3027.76 ; U6.44@2417.99,2769.35 2417.99,2783.83 2432.76,2783.83 ; 2432.76,2783.83 2435.01,2783.83 U6.45@2449.49,2769.35 ; U6.45@2449.49,2769.35 2449.49,2783.83 2466.5,2783.83 U6.46@2480.98,2769.35 ; U6.46@2480.98,2769.35 2480.98,2783.83 2498,2783.83 U6.47@2512.48,2769.35 ; U6.47@2512.48,2769.35 2512.48,2783.83 2543.98,2783.83 ; 2543.98,2783.83 2552.67,2792.52 2560.55,2792.52 ; LED9.2@2683.08,3754.7 2704.45,3733.32 2972.79,3733.32 ; BOOTMODE.3@2685.08,2362.16 2687.93,2275.07 ; BOOTMODE.3@2685.08,2362.16 BOOTMODE.4 2989.39,2362.16 ; 2815,3216.18 2815,3296.25 3112.43,3593.68 ; 2852.19,2776.85 U2.5 2888.32,2790.47 2888.32,2810.16 2885.41,2810.16 ; 2893.32,2595.16 2940.16,2595.16 2950,2605 ; 2940,2945 2947.09,2704.04 ; 2940,2945 3053.49,2945 ESPU1.1@3074.04,2965.55 ; 2947.09,2704.04 2950,2605 ; 2950,2605 3040,2530 3040,2400 3002.16,2362.16 ; 2972.79,3733.32 3112.43,3593.68 ; 2989.39,2362.16 3002.16,2362.16 ; 3002.16,2362.16 3069.78,2362.16 3144.37,2287.57 C6.2 3144.37,2231.22 3144.37,2212.44 3175.82,2180.99 3175.82,2140 C5.1 3218.9,2140 ; ESPU1.1@3074.04,2965.55 3123.28,2965.55 3137.73,2980 C4.1 3351.21,3008.77 3413.17,3008.77 3504.37,2917.57 ; 3112.43,3593.68 3127.11,3579 3346.67,3579 ; 3346.67,3579 3496.21,3429.46 LED6.2 3537.57,3276.11 3668.35,3145.33 ; C3.1@3500.93,2685 3487.56,2698.37 C1.2 3514.3,2780 3514.3,2787.34 3555.25,2828.29 ; 3504.37,2917.57 3668.35,3081.55 3668.35,3145.33 ; 3504.37,2917.57 C2.1 3504.37,2842.44 3518.52,2828.29 3555.25,2828.29
  Top Layer w23.62: v1(2585,2060) ESPUSB1.13@2649.73,2066.85 ; ESPUSB1.1 2685.08,2362.16 2944.92,2362.16 3002.16,2362.16 3040,2400 3040,2530 2950,2605 2940,2945 2898.11,2955.63 Q2.2@2852.4,2955.63
  Mid-Layer 1 w10: 2515,2014 2555,2000 ; 2515.3,2014.1 2512.56,2015.1 2504.59,2018.07 2496.64,2021.12 2488.72,2024.25 2480.83,2027.45 2472.98,2030.72 2465.15,2034.06 2457.36,2037.48 2449.6,2040.97 2441.87,2044.54 2434.17,2048.18 2426.51,2051.89 2418.89,2055.67 2411.3,2059.52 2403.74,2063.44 2396.23,2067.44 2388.75,2071.5 2381.31,2075.64 2373.91,2079.84 2366.55,2084.12 2359.23,2088.46 2351.96,2092.88 2344.72,2097.36 2337.53,2101.9 2330.37,2106.52 2323.27,2111.2 2316.2,2115.95 2309.19,2120.77 2302.21,2125.65 2295.29,2130.59 2288.41,2135.61 2281.58,2140.68 2274.79,2145.82 2268.06,2151.02 2261.37,2156.29 2254.73,2161.62 2248.15,2167.01 2241.61,2172.46 2235.13,2177.98 2228.7,2183.55 2222.32,2189.19 2215.99,2194.88 2209.72,2200.64 2203.51,2206.45 2197.34,2212.32 2191.24,2218.25 2185.19,2224.23 2179.19,2230.27 2173.25,2236.37 2167.37,2242.53 2161.55,2248.73 2155.79,2255 2150.08,2261.31 2144.44,2267.68 2138.86,2274.11 2133.33,2280.58 2127.87,2287.11 2122.47,2293.69 2117.13,2300.32 2111.85,2307 2106.64,2313.72 2101.49,2320.5 2096.41,2327.32 2091.38,2334.2 2086.43,2341.11 2081.54,2348.08 2076.71,2355.09 2071.95,2362.15 2067.26,2369.25 2062.63,2376.39 2058.07,2383.58 2053.58,2390.81 2049.16,2398.08 2044.8,2405.39 2040.52,2412.75 2036.3,2420.14 2032.16,2427.57 2028.08,2435.04 2024.07,2442.55 2020.14,2450.1 2016.27,2457.68 2012.48,2465.3 2008.76,2472.96 2005.11,2480.65 2001.53,2488.37 1998.03,2496.13 1994.6,2503.92 1991.24,2511.74 1987.96,2519.59 1984.75,2527.47 1981.61,2535.38 1978.55,2543.33 1975.57,2551.3 1972.66,2559.29 1969.82,2567.32 1967.06,2575.37 1964.38,2583.45 1961.77,2591.55 1959.24,2599.67 1956.78,2607.82 1954.4,2615.99 1952.1,2624.19 1949.87,2632.4 1947.73,2640.64 1945.66,2648.9 1943.66,2657.17 1941.75,2665.46 1939.91,2673.77 1938.16,2682.1 1936.48,2690.45 1934.87,2698.8 1933.35,2707.18 1931.91,2715.57 1930.54,2723.97 1929.26,2732.38 1928.05,2740.81 1926.92,2749.24 1925.87,2757.69 1924.9,2766.14 1924.01,2774.61 1923.21,2783.08 1922.47,2791.56 1921.82,2800.05 1921.25,2808.54 1920.76,2817.04 1920.35,2825.54 1920.02,2834.04 1919.77,2842.55 1919.6,2851.06 1919.51,2859.57 1919.5,2868.08 1919.57,2876.59 1919.72,2885.1 1919.94,2893.61 1920.25,2902.11 1920.64,2910.62 1921.11,2919.11 1921.66,2927.61 1922.29,2936.1 1923,2944.58 1923.78,2953.05 1924.65,2961.52 1925.6,2969.98 1926.62,2978.43 1927.73,2986.87 1928.92,2995.29 1930.18,3003.71 1931.52,3012.12 1932.94,3020.51 1934.45,3028.88 1936.03,3037.25 1937.68,3045.6 1939.42,3053.93 1941.24,3062.24 1943.13,3070.54 1945.1,3078.82 1947.15,3087.08 1949.27,3095.32 1951.48,3103.54 1953.76,3111.74 1956.12,3119.92 1958.55,3128.08 1961.06,3136.21 1963.65,3144.32 1966.31,3152.4 1969.05,3160.46 1971.87,3168.49 1974.76,3176.5 1977.72,3184.48 1980.76,3192.43 1983.88,3200.35 1987.07,3208.24 1990.33,3216.1 1993.67,3223.93 1997.08,3231.73 2000.56,3239.49 2004.12,3247.22 2007.75,3254.92 2011.45,3262.59 2015.22,3270.22 2019.06,3277.81 2022.98,3285.37 2026.97,3292.89 2031.02,3300.37 2035.15,3307.81 2039.35,3315.22 2043.61,3322.58 2047.95,3329.9 2052.35,3337.19 2056.83,3344.43 2061.37,3351.63 2065.97,3358.78 2070.65,3365.9 2075.39,3372.97 2080.2,3379.99 2085.07,3386.97 2090.01,3393.9 2095.01,3400.78 2100.08,3407.62 2105.21,3414.41 2110.41,3421.15 2115.67,3427.84 2120.99,3434.49 2126.37,3441.08 2131.82,3447.62 2137.33,3454.11 2142.89,3460.55 2148.52,3466.93 2154.21,3473.26 2159.96,3479.54 2165.76,3485.76 2171.62,3491.93 2177.55,3498.05 2183.52,3504.1 2189.56,3510.11 2195.65,3516.05 2201.8,3521.94 2208,3527.76 2214.26,3533.53 2220.57,3539.25 2226.93,3544.9 2233.35,3550.49 2239.82,3556.02 2246.34,3561.49 2252.91,3566.9 2259.53,3572.24 2266.21,3577.53 2272.93,3582.75 2279.7,3587.91 2286.52,3593 2293.38,3598.03 2300.3,3602.99 2307.26,3607.89 2314.26,3612.72 2321.31,3617.49 2328.41,3622.19 2335.55,3626.83 2342.73,3631.39 2349.95,3635.89 2357.22,3640.32 2364.53,3644.69 2371.88,3648.98 2379.27,3653.21 2386.69,3657.36 2394.16,3661.44 2401.67,3665.46 2409.21,3669.4 2416.79,3673.28 2424.4,3677.08 2432.05,3680.81 2439.74,3684.46 2447.46,3688.05 2455.21,3691.56 2463,3695 2470.81,3698.37 2478.66,3701.66 2486.54,3704.88 2494.45,3708.02 2502.39,3711.09 2510.36,3714.08 2518.35,3717 2526.37,3719.85 2534.42,3722.62 2542.49,3725.31 2550.59,3727.93 2558.72,3730.47 2566.86,3732.93 2575.03,3735.32 2583.22,3737.63 2591.44,3739.87 2599.67,3742.02 2607.92,3744.1 2616.19,3746.11 2624.49,3748.03 2632.79,3749.87 2641.12,3751.64 2649.46,3753.33 2657.82,3754.94 2666.19,3756.47 2674.58,3757.93 2682.98,3759.3 2691.39,3760.6 2699.81,3761.81 2708.25,3762.95 2716.69,3764.01 2725.15,3764.99 2733.61,3765.89 2742.08,3766.7 2750.56,3767.44 2759.05,3768.1 2767.54,3768.68 2776.03,3769.18 2784.54,3769.6 2793.04,3769.94 2801.55,3770.21 2810.06,3770.39 2818.57,3770.49 2827.08,3770.51 2835.59,3770.45 2844.1,3770.31 2852.61,3770.09 2861.11,3769.79 2869.62,3769.41 2878.11,3768.95 2886.61,3768.41 2895.1,3767.79 2903.58,3767.09 2912.05,3766.32 2920.52,3765.46 2928.98,3764.52 2937.43,3763.5 2945.87,3762.41 2954.3,3761.23 2962.72,3759.98 2971.13,3758.64 2979.52,3757.23 2987.9,3755.74 2996.26,3754.17 3004.61,3752.52 3012.95,3750.79 3021.26,3748.98 3029.56,3747.1 3037.85,3745.14 3046.11,3743.1 3054.35,3740.98 3062.58,3738.79 3070.78,3736.52 3078.96,3734.17 3087.12,3731.74 3095.25,3729.24 3103.36,3726.66 3111.45,3724.01 3119.51,3721.28 3127.55,3718.47 3135.56,3715.59 3143.54,3712.63 3151.49,3709.6 3159.41,3706.5 3167.31,3703.32 3175.17,3700.06 3183.01,3696.73 3190.81,3693.33 3198.58,3689.86 3206.31,3686.31 3214.02,3682.69 3221.69,3679 3229.32,3675.23 3236.92,3671.4 3244.48,3667.49 3252,3663.51 3259.49,3659.46 3266.94,3655.34 3274.35,3651.15 3281.72,3646.9 3289.04,3642.57 3296.33,3638.17 3303.58,3633.71 3310.78,3629.18 3317.94,3624.58 3325.06,3619.91 3332.14,3615.18 3339.16,3610.38 3346.15,3605.51 3353.08,3600.58 3359.97,3595.58 3366.82,3590.52 3373.61,3585.4 3380.36,3580.21 3387.06,3574.96 3393.71,3569.64 3400.3,3564.27 3406.85,3558.83 3413.35,3553.33 3419.79,3547.77 3426.18,3542.15 3432.52,3536.47 3438.8,3530.73 3445.03,3524.93 3451.21,3519.07 3457.33,3513.16 3463.39,3507.19 3469.4,3501.16 3475.35,3495.07 3481.25,3488.93 3487.08,3482.74 3492.86,3476.49 3498.58,3470.18 3504.24,3463.82 3509.83,3457.41 3515.37,3450.95 3520.85,3444.43 3526.26,3437.87 3531.62,3431.25 3536.91,3424.59 3542.14,3417.87 3547.3,3411.1 3552.4,3404.29 3557.44,3397.43 3562.41,3390.52 3567.32,3383.57 3572.16,3376.57 3576.94,3369.52 3581.64,3362.43 3586.29,3355.3 3590.86,3348.12 3595.37,3340.9 3599.81,3333.64 3604.18,3326.34 3608.48,3318.99 3612.71,3311.61 3616.88,3304.19 3620.97,3296.72 3624.99,3289.22 3628.94,3281.68 3632.82,3274.11 3636.63,3266.5 3640.37,3258.85 3644.04,3251.17 3647.63,3243.46 3651.15,3235.71 3654.6,3227.93 3657.97,3220.11 3661.28,3212.27 3664.5,3204.39 3667.66,3196.49 3670.73,3188.55 3673.74,3180.59 3676.67,3172.6 3679.52,3164.58 3682.3,3156.53 3685,3148.46 3687.63,3140.37 3690.18,3132.25 3692.65,3124.1 3695.05,3115.94 3697.37,3107.75 3699.61,3099.54 3701.78,3091.31 3703.87,3083.05 3705.88,3074.78 3707.81,3066.5 3709.66,3058.19 3711.44,3049.87 3713.14,3041.53 3714.76,3033.17 3716.3,3024.8 3717.76,3016.42 3719.15,3008.02 3720.45,2999.61 3721.68,2991.18 3722.82,2982.75 3723.89,2974.31 3724.88,2965.85 3725.79,2957.39 3726.61,2948.92 3727.36,2940.44 3728.03,2931.96 3728.62,2923.47 3729.13,2914.97 3729.56,2906.47 3729.91,2897.97 3730.18,2889.46 3730.37,2880.95 3730.48,2872.44 3730.51,2863.93 3730.46,2855.42 3730.33,2846.91 3730.12,2838.4 3729.83,2829.89 3729.46,2821.39 3729.01,2812.89 3728.48,2804.4 3727.87,2795.91 3727.18,2787.42 3726.41,2778.95 3725.57,2770.48 3724.64,2762.02 3723.63,2753.57 3722.54,2745.13 3721.38,2736.69 3720.13,2728.27 3718.81,2719.87 3717.4,2711.47 3715.92,2703.09 3714.36,2694.73 3712.72,2686.37 3711,2678.04 3709.2,2669.72 3707.33,2661.42 3705.38,2653.13 3703.35,2644.87 3701.24,2636.62 3699.05,2628.39 3696.79,2620.19 3694.45,2612.01 3692.04,2603.85 3689.54,2595.71 3686.97,2587.59 3684.33,2579.5 3681.61,2571.44 3678.81,2563.4 3675.94,2555.39 3672.99,2547.4 3669.97,2539.45 3666.87,2531.52 3663.7,2523.62 3660.45,2515.75 3657.13,2507.92 3653.74,2500.11 3650.27,2492.34 3646.73,2484.6 3643.12,2476.89 3639.44,2469.22 3635.68,2461.58 3631.85,2453.98 3627.96,2446.41 3623.99,2438.89 3619.95,2431.39 3615.83,2423.94 3611.65,2416.53 3607.4,2409.15 3603.09,2401.82 3598.7,2394.53 3594.24,2387.28 3589.72,2380.07 3585.13,2372.9 3580.47,2365.78 3575.74,2358.7 3570.95,2351.67 3566.09,2344.68 3561.17,2337.73 3556.18,2330.84 3551.13,2323.99 3546.01,2317.19 3540.83,2310.44 3535.58,2303.73 3530.28,2297.08 3524.91,2290.47 3519.48,2283.92 3513.98,2277.42 3508.43,2270.97 3502.82,2264.57 3497.14,2258.23 3491.41,2251.94 3485.62,2245.7 3479.77,2239.52 3473.86,2233.39 3467.9,2227.32 3461.87,2221.31 3455.8,2215.35 3449.66,2209.45 3443.47,2203.61 3437.23,2197.82 3430.93,2192.1 3424.58,2186.43 3418.18,2180.83 3411.72,2175.28 3405.21,2169.8 3398.65,2164.37 3392.04,2159.01 3385.38,2153.71 3378.67,2148.48 3371.91,2143.31 3365.1,2138.2 3358.25,2133.15 3351.34,2128.17 3344.39,2123.26 3337.4,2118.41 3330.36,2113.63 3323.28,2108.91 3316.15,2104.26 3308.97,2099.68 3301.76,2095.16 3294.5,2090.71 3287.2,2086.34 3279.87,2082.03 3272.49,2077.79 3265.07,2073.61 3257.61,2069.51 3250.11,2065.48 3248.74,2066.85 ESPUSB1.14@2990.28,2066.85 ; v1(2585,2060) 2555,2000 ; ESPUSB1.13@2649.73,1901.49 2555,1996.22 2555,2000 ; v1(2893.16,2733.03) 2935.28,2733.03 v1(2963.64,2704.67)
  Mid-Layer 1 w23.62: 2515,2014 2555,2000 v1(2585,2060) ; 2515.3,2014.1 cw(c2825,2865) 3250.11,2065.48
  Mid-Layer 2 w10: ESPUSB1.14@2990.28,1901.49 ESPUSB1.14@2990.28,2066.85
HEATER_IN: C5.2 C6.1 HEATER.2 | length 1571.2
  Top Layer w10: 2915,2110 2915,2125 2985,2190 ; 3033.04,2140 3033.75,2140 ; C6.1@3070.63,2250 C6.1 3045,2250 2985,2190 ; C5.2@3152.44,2140 C5.2 3033.75,2140 ; HEATER.2 3180,1990 3033.75,2140 ; 2985,2190 3033.75,2140
  Top Layer w23.62: 2915,2110 2915,2125 2985,2190 ; 3033.04,2140 C5.2@3152.44,2140 ; C6.1@3070.63,2250 3045,2250 2985,2190 ; HEATER.2 3180,1990 2985,2190
  Bottom Layer w10: HEATER.2 3220,1955 3251.97,1965.98 3279.67,1980.26 3309.17,1996.69 3338.1,2014.08 3364.28,2030.98 3389.93,2048.69 3415.03,2067.17
IO6: LED1.3 U6.20 | length 1809.1
  Top Layer w10: v1(2217.01,2955.01) 2217.01,3041.18 2292.01,3116.18 U6.20 ; v1(3226.33,1991.31) 3263.88,1991.31 LED1.3
  Mid-Layer 1 w10: v1(2217.01,2955.01) 2778.52,2393.5 2778.52,2153.59 2940.8,1991.31 v1(3226.33,1991.31)
IO10: R1.2 U6.16 | length 423.9
  Top Layer w10: U6.16 2417.99,3169.65 2513.34,3265 R1.2
IOA4: U1.1 U2.1 U6.18 | length 961.3
  Top Layer w10: v1(2328.77,3236.27) 2355,3210.04 U6.18 ; v1(2687.94,2875.61) 2705.6,2875.61 2731.68,2849.53 U2.1 ; v1(2756.05,2707.37) 2759.19,2704.23 U1.1
  Mid-Layer 1 w10: v1(2328.77,3236.27) 2328.77,3234.78 v1(2687.94,2875.61) 2687.94,2775.48 v1(2756.05,2707.37)
IOA5: U1.2 U2.2 U6.19 | length 984.6
  Top Layer w10: U6.19 2323.5,3116.18 2372.33,3067.35 2465.88,3067.35 2553.27,2979.96 v1(2553.27,2873.64) ; v1(2709.45,2656.56) 2727.66,2656.56 ; U2.2 2731.68,2829.84 2727.66,2825.82 2727.66,2656.56 ; U1.2 2736.68,2614.84 2727.66,2623.86 2727.66,2656.56
  Mid-Layer 1 w10: v1(2553.27,2873.64) 2553.27,2812.74 v1(2709.45,2656.56)
LED2_3: LED1.1 LED2.3 | length 324.2
  Top Layer w10: LED1.1 3395.03,2196.92 LED2.3@3543.55,2196.92
LED3_3: LED2.1 LED3.3 | length 300
  Top Layer w10: LED2.1 3519.71,2277.17 LED3.3
LED4_3: LED3.1 LED4.3 | length 324.2
  Top Layer w10: LED3.1 3805.39,2680.77 LED4.3
LED5_3: LED4.1 LED5.3 | length 308.5
  Top Layer w10: LED4.1 3734.06,3147.04 LED5.3
LED6_3: LED5.1 LED6.3 | length 322.2
  Top Layer w10: LED6.3 3592.97,3269.38 LED5.1@3675.05,3187.3
LED7_3: LED6.1 LED7.3 | length 315.2
  Top Layer w10: LED7.3 3332.76,3639.88 LED6.1
LED8_3: LED7.1 LED8.3 | length 318.6
  Top Layer w10: LED8.3 3174.03,3663.71 LED7.1
LED9_3: LED8.1 LED9.3 | length 320
  Top Layer w10: LED9.3 2730.23,3764.81 LED8.1
LED10_3: LED9.1 LED10.3 | length 313
  Top Layer w10: LED10.3 2595.38,3715.68 LED9.1
LED11_3: LED10.1 LED11.3 | length 323.1
  Top Layer w10: LED11.3 2209.8,3631.61 LED10.1
LED12_3: LED11.1 LED12.3 | length 305.8
  Top Layer w10: LED12.3 1899.64,3213.27 LED11.1
LED13_3: LED12.1 LED13.3 | length 324.4
  Top Layer w10: LED13.3 1844,3016.94 LED12.1@1954.61,3127.55
LED14_3: LED13.1 LED14.3 | length 302.5
  Top Layer w10: LED14.3@1910.75,2508.83 1910.75,2801.58 LED13.1
LED15_3: LED14.1 LED15.3 | length 323.8
  Top Layer w10: LED14.1 2091.69,2398.67 LED15.3
LED16_1: LED16.1
LED16_3: LED15.1 LED16.3 | length 310.5
  Top Layer w10: LED15.1 2173.96,2189.03 LED16.3
R1_1: Q2.1 R1.1 R2.1 | length 491.3
  Top Layer w10: R2.1 2775.63,3076.9 2775.72,3076.9 2777.6,3075.02 2777.6,2996.23 Q2.1 ; 2777.62,3075.04 2884.82,3075.04 2892.96,3083.18 2892.96,3259.7 2887.66,3265 R1.1
THERMAL_SENSING: HEATER.1 Q2.3 U2.9 | length 521.1
  Top Layer w10: U2.9 2812.21,2822.21 HEATER.1 Q2.3@2815,3035 ; Q2.3@2815,3025 Q2.3@2815,3035 ; Q2.3 Q2.3@2815,3035
  Top Layer w23.62: HEATER.1 2815,3035 Q2.3@2815,3025
  Top Layer w62.99: U2.9 2812.21,2822.21 HEATER.1
  Bottom Layer w10: 2790.67,2905.51 2788.01,2900.7 2786.14,2894.87 2785.43,2889.18 2785.82,2883.55 2787.24,2878.68 2789.76,2874.36 2793.11,2871.11 HEATER.1@2797.51,2868.73 ; HEATER.1@2797.68,2868.66 2800.71,2868.18 2804.26,2868.47 2807.56,2869.42 2810.32,2870.99 2811.84,2872.63 2812.51,2874.61 HEATER.1 HEATER.1@2811.04,2878.79
U1_3: U1.3
U1_9: U1.9
U2_3: U2.3
U6_4: U6.4
U6_5: U6.5
U6_6: U6.6
U6_7: U6.7
U6_8: ESPR6.1 U6.8 | length 303
  Top Layer w10: U6.8 2614.02,3012.99 2656.17,3055.14 2656.17,3096.05 2750.12,3190 ESPR6.1
U6_9: U6.9
U6_10: U6.10
U6_11: U6.11
U6_12: U6.12
U6_13: U6.13
U6_14: U6.14
U6_15: U6.15
U6_17: U6.17
U6_21: U6.21
U6_22: U6.22
U6_24: U6.24
U6_25: U6.25
U6_28: U6.28
U6_29: U6.29
U6_30: U6.30
U6_31: U6.31
U6_32: U6.32
U6_33: U6.33
U6_34: U6.34
U6_35: U6.35
UD+: ESPUSB1.6 ESPUSB1.8 U6.27 | length 1545.4
  Top Layer w10: v1(2087.05,2995.24) 2087.05,3035.56 2095.98,3044.49 U6.27 ; ESPUSB1.6 2810.16,2055.86 2812.72,2053.3 2846.97,2053.3 2849.53,2055.86 2849.53,2072.19 ESPUSB1.8 2849.53,2276.58 2867.36,2294.41 2867.36,2300.7 2878.82,2312.16 v1(2903.03,2312.16)
  Mid-Layer 1 w10: v1(2087.05,2995.24) 2219.95,2995.24 v1(2903.03,2312.16)
UD-: ESPUSB1.5 ESPUSB1.7 U6.26 | length 1476.3
  Top Layer w10: U6.26 2149.46,3075.98 2152.16,3073.28 v1(2173.13,3073.28) ; ESPUSB1.5 2790.48,2121.15 2793.41,2124.08 2801.58,2124.08 ; v1(2801.58,2163.14) 2801.58,2124.08 ; ESPUSB1.7 2829.85,2121.15 2826.92,2124.08 2801.58,2124.08
  Mid-Layer 1 w10: v1(2173.13,3073.28) 2176.13,3073.28 2930,2319.41 2930,2291.56 v1(2801.58,2163.14)
pads on no net: ESPUSB1. ESPUSB1.3 ESPUSB1.9

## Polygon pours and split planes (outlines as drawn)
GND on Mid-Layer 2 (solid): 3655,2060 3644.15,2070.85 3690,2060 3655,2060
GND on Mid-Layer 1 (solid): 1610,3970 4090,3970 4355,3705 4355,2335 3750,1730 1790,1730 1530,1990
GND on Top Layer (solid): 1650,4260 3675,4260 4375,3560 4375,2395 3480,1500 1680,1500 1620,1560 1620,1650 1500,1770

## Keep-outs
Keep-Out Layer:
  circle w10: c2825,2865 r1023.62